# EAGLE board PCB_ANILLO (EAGLE 9.6.2)
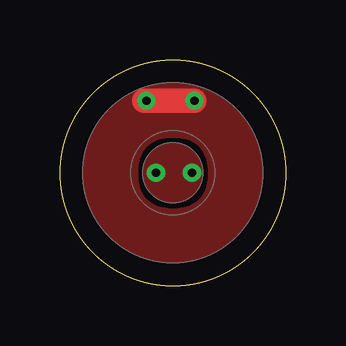
[diagram p0: board, top side]
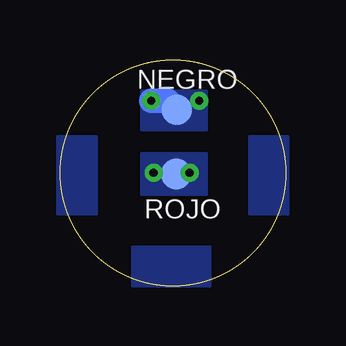
[diagram p1: board, bottom side, seen from below]

Size 9.4 x 9.4 mm. Coordinates in mm from the lower left corner, seen from the top.
Outline: circle at 4.7,4.7 radius 4.7
Copper layers (1+2*15+16): Top 0.035mm / dielectric 1.5mm / Route2 0.035mm / dielectric 0.15mm / Route15 0.035mm / dielectric 0.2mm / Bottom 0.035mm
Design rules "default *": minimum track width 0.00038125mm, minimum drill 0.35mm, track to track 8mil, track to pad 8mil, pad to pad 8mil, via to via 8mil, smd to smd 0mil, copper to edge 0mil, drill to drill 6mil, minimum pad ring 10mil, minimum via ring 8mil, stop-mask expansion 0mil, vias tented up to drill 50mil, thermal gap 0mil

## Footprints (pad centres in the part's own frame; a part is rotated, then mirrored left to right if it is on the bottom)
TESTPAD_B1,27 = smd 1.27 x 1.27: TP 0,0

## Placement (x,y rotation side)
GND  TESTPAD_TPSQB1,27  [TESTPAD_B1,27]  4.54,7.32 0 bottom
VPOS  TESTPAD_TPSQB1,27  [TESTPAD_B1,27]  4.55,4.65 0 bottom

## Library data of the parts
GND VPOS = BeagleBone_Blue_R3

## Nets
GND: GND.TP
VPOS: VPOS.TP

## Tracks (layer width: path | path; a pad name or v marks a point on that pad's centre or on a via)
GND  (via drill 0.35)
  Top 1.016: 3.5,7.7 v5.6,7.7
  Bottom 1.016: v5.6,7.7 4.92,7.7 GND.TP
  other vias: 3.6,7.7
  pour Top (rank 2): 8.45,4.7 arc180 0.95,4.7 arc180
  pour Top (isolate 2.54): 8.45,4.7 arc180 0.95,4.7 arc180
  pour Bottom: 3.3,8.1 6,8.1 6,6.5 3.3,6.5
N$1
  pour Bottom: 3.17,0 3.17,1.6 6.37,1.6 6.37,0
N$2
  pour Bottom: 7.89,6.2 9.49,6.2 9.49,3 7.89,3
N$3
  pour Bottom: -0.1,6.2 1.5,6.2 1.5,3 -0.1,3
VPOS  (via drill 0.35)
  Bottom 0.254: v5.5,4.7 4.6,4.7 VPOS.TP
  other vias: 4,4.7
  pour Bottom: 3.3,5.5 6,5.5 6,3.8 3.3,3.8
  pour Top (isolate 0.5): 5.96,4.69 arc180 3.46,4.69 arc180

## Text on the board
bPlace: NEGRO | ROJO